# Altium PCB IObuffer.PcbDoc
Units mm, origin at the board's own origin, x right, y up, seen from the top; angles counter-clockwise.
Board outline 36 x 36 mm, 2 copper layers (Top Layer, Bottom Layer), stack 1.58 mm thick; 23 components, 17 nets, 90 pads, 30 vias.
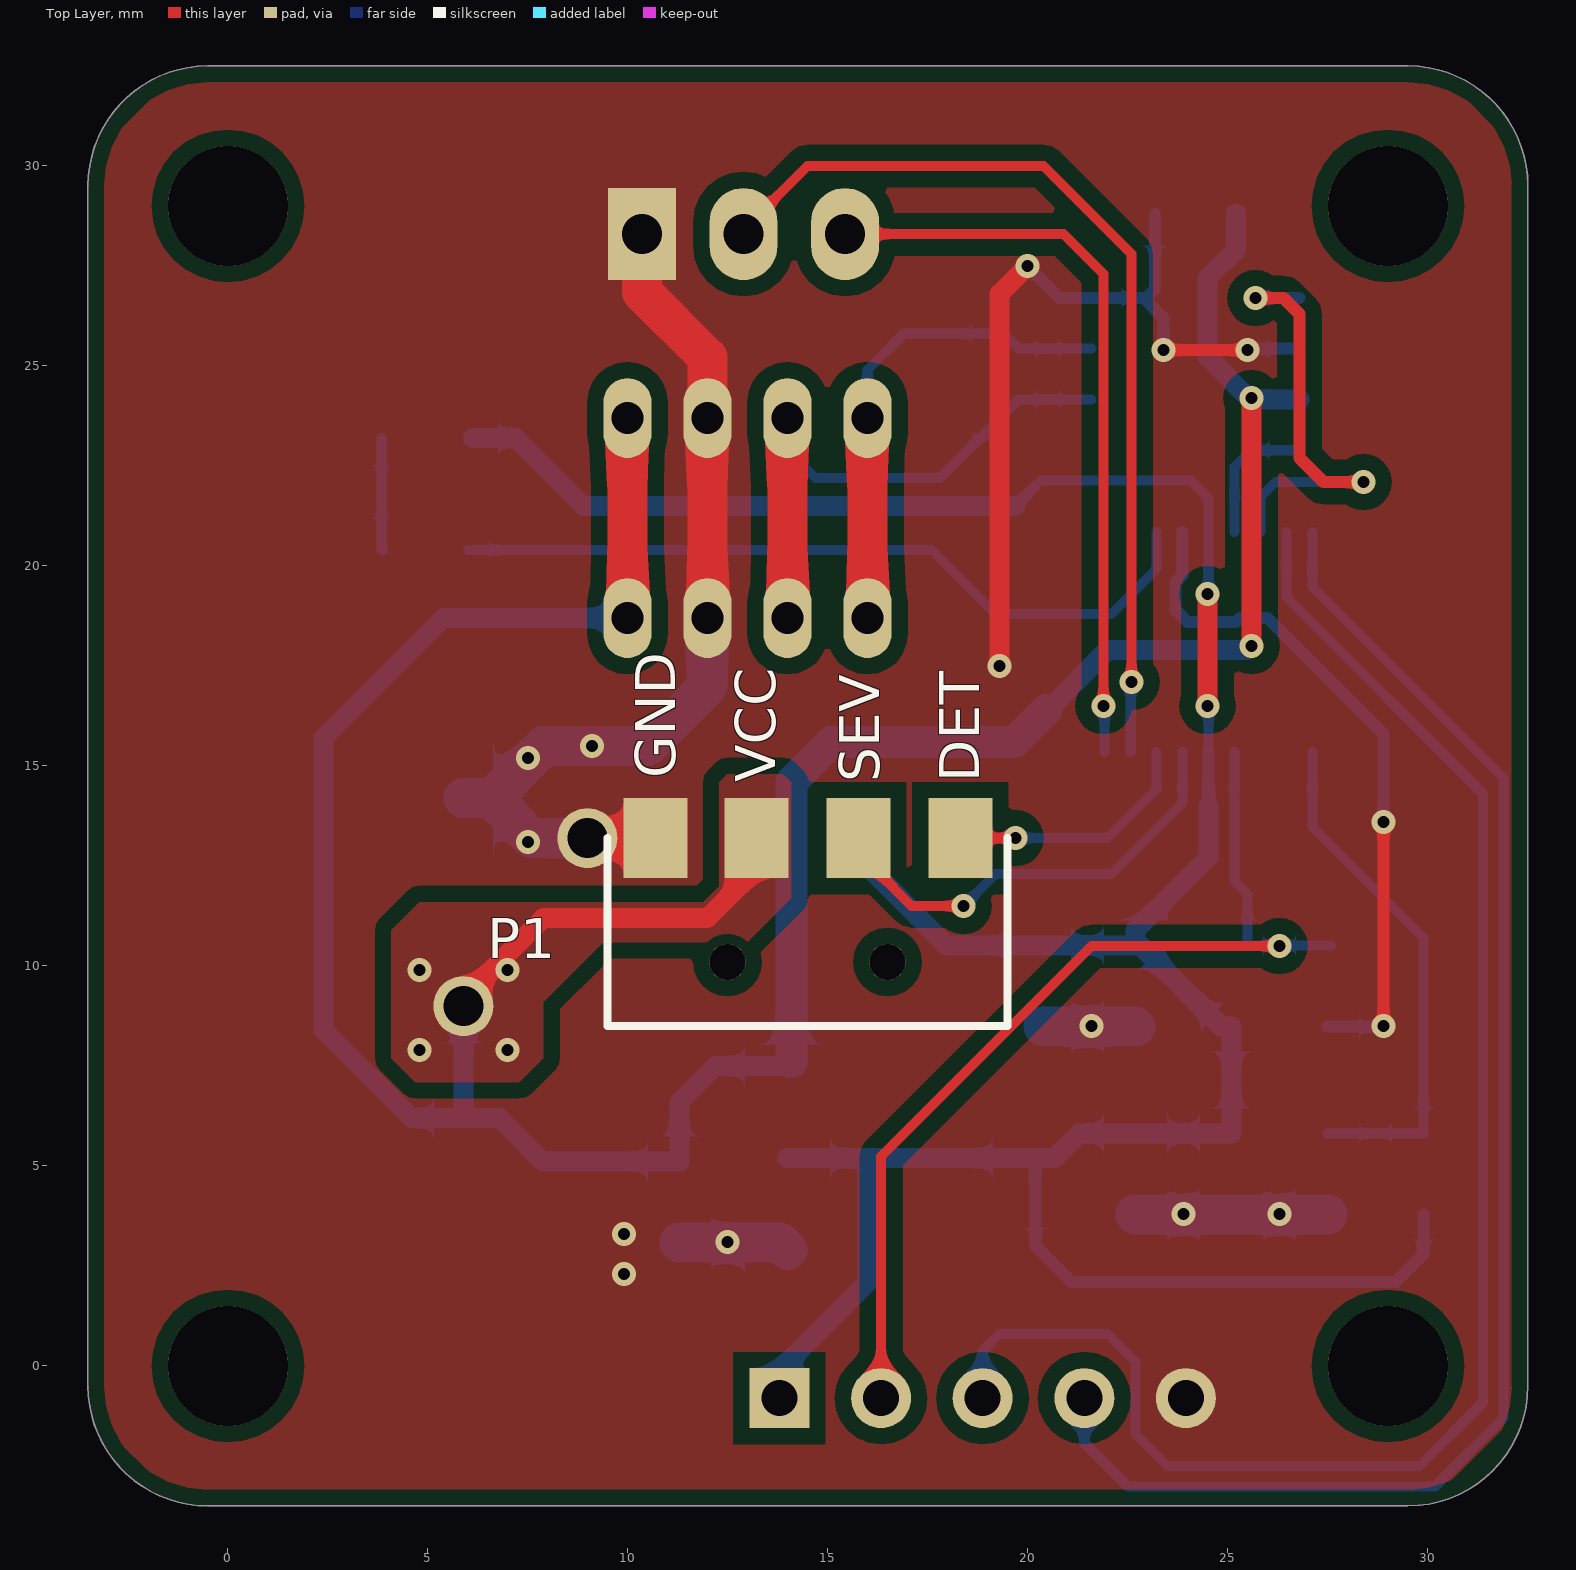
[diagram p0: Top Layer view]
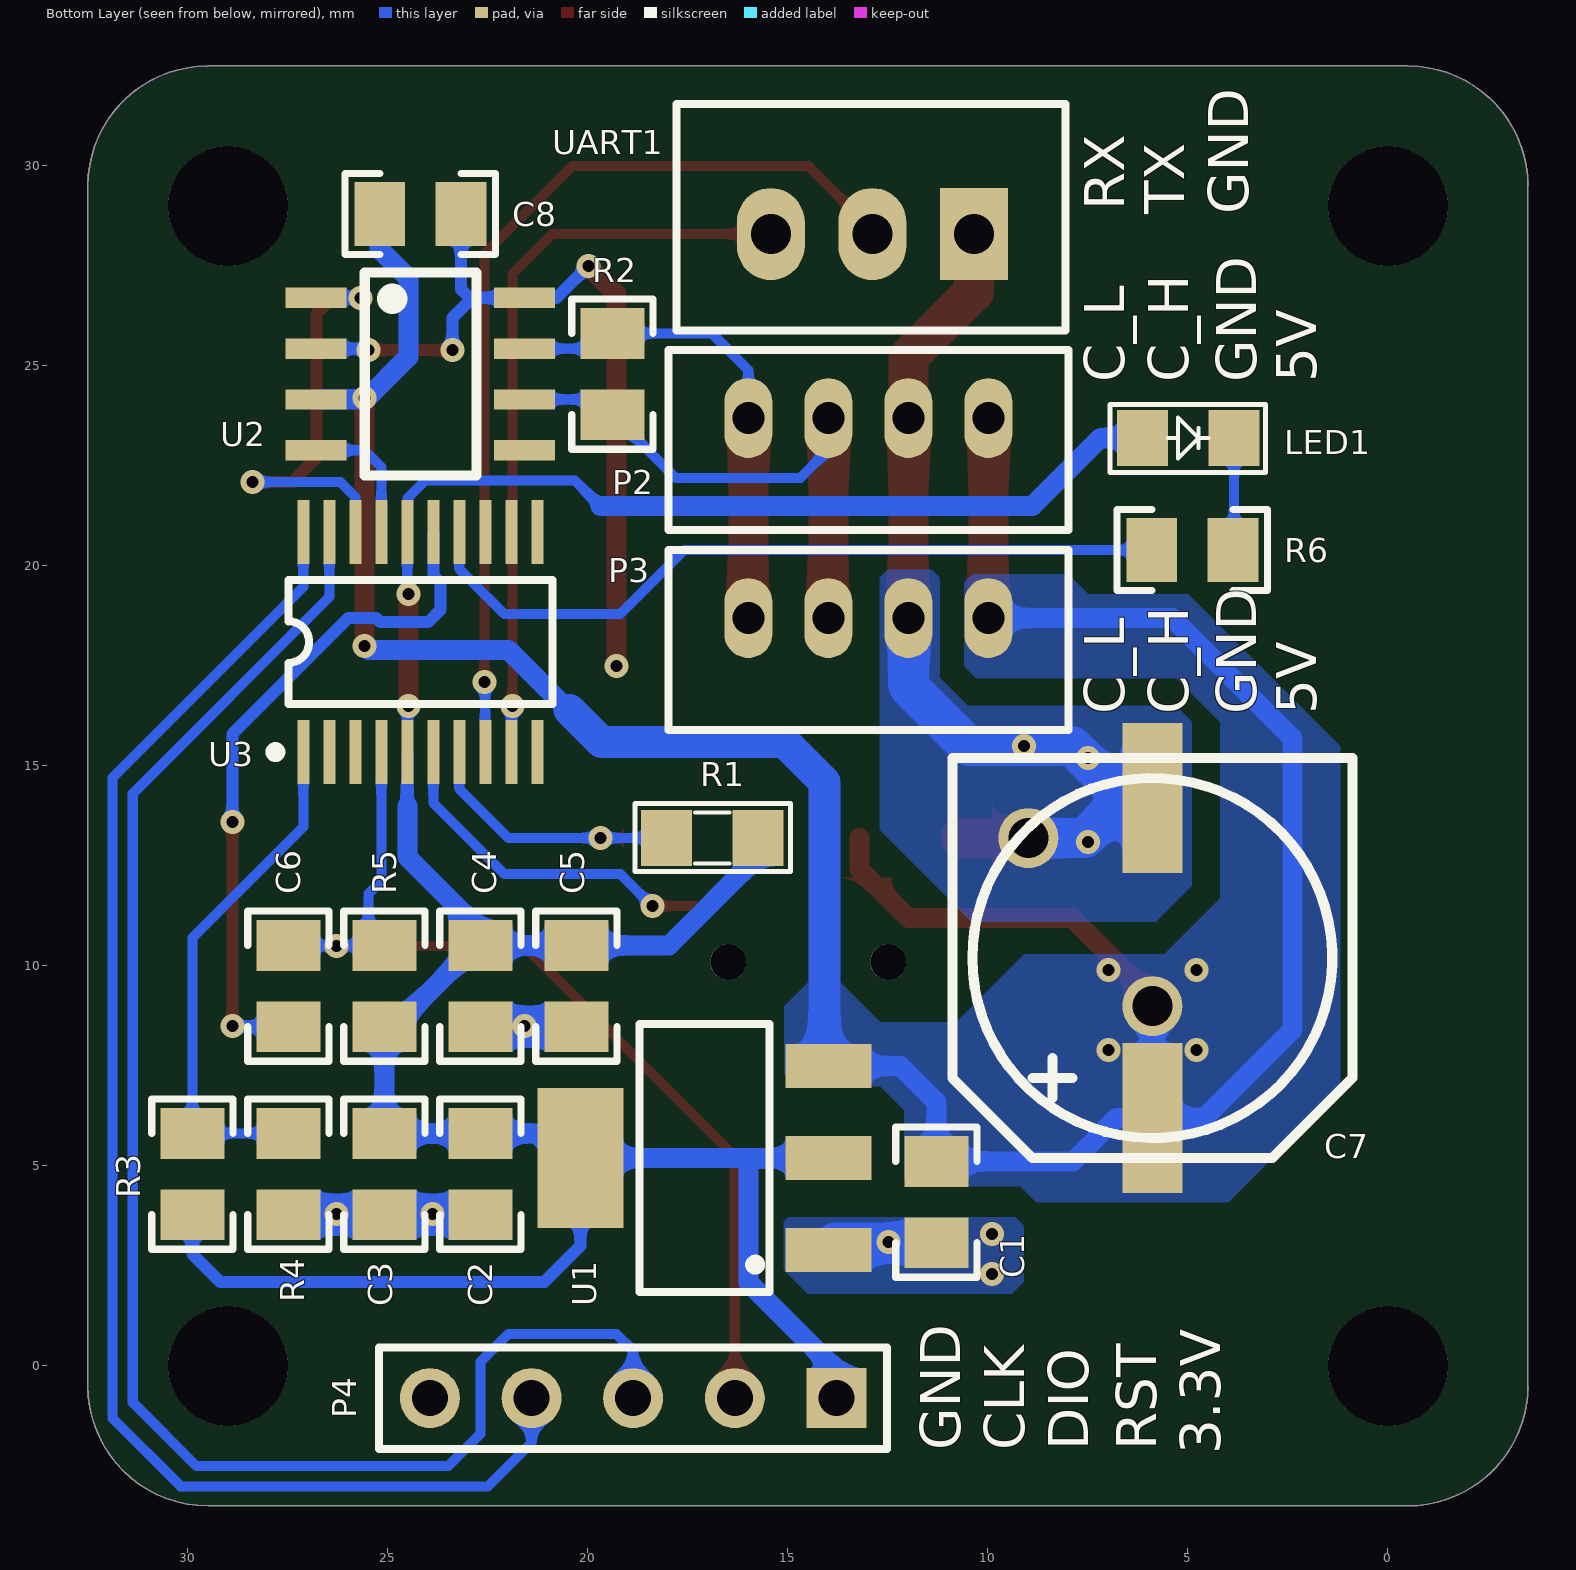
[diagram p1: Bottom Layer view, seen from below]

## Layer stack, top to bottom
Top Solder: solder mask 0.0102, Solder Resist, Dk 3.5
Top Layer: signal copper 0.0356
Dielectric 1: dielectric 1.5086, FR-4, Dk 4.8
Bottom Layer: signal copper 0.0356
Bottom Solder: solder mask 0.0102, Solder Resist, Dk 3.5

## Board outline
-0.5,-3.5 cw(c-0.5,-0.5) -3.5,-0.5 -3.5,29.5 cw(c-0.5,29.5) -0.5,32.5 29.5,32.5 cw(c29.5,29.5) 32.5,29.5 32.5,-0.5 cw(c29.5,-0.5) 29.5,-3.5

## Design rules (kind name [scope] priority, off if disabled: settings)
Clearance [All] p1: gap=0.254
HoleSize [All] p1: absolutevalues=TRUE maxlimit=5 minlimit=0.01 maxpercent=80.000 minpercent=20.000
MinimumSolderMaskSliver [All] p1: minsoldermaskwidth=0.01
PolygonConnect [All] p1: connectstyle=Direct reliefconductorwidth=0.254 reliefentries=4 polygonreliefangle="90 Angle" airgapwidth=0.254
RoutingVias [All] p1: holewidth=0.3 width=0.6 viastyle="Through Hole" minholewidth=0.3 minwidth=0.6 maxholewidth=5 maxwidth=5
SilkToSilkClearance [All] p1: silktosilkclearance=0.1
SilkToSolderMaskClearance [IsPad] p1: minsilkscreentomaskgap=0.01 clearancetoexposedcopper=TRUE
SolderMaskExpansion [All] p1: expansion=0.102
Width [All] p1: maxlimit=5 minlimit=0.254 preferedwidth=0.254
26 further rules are at their usual default settings.

## Components (designator, comment, footprint, x,y, rotation, side; value= is the part's Value field where it differs from the comment)
C1 "105" 0805_HV 11.289,4.097 r90 bottom
C2 "105" 0805_HV 22.689,4.797 r90 bottom
C3 "105" 0805_HV 25.089,4.797 r90 bottom
C4 "104" 0805_HV 22.689,9.497 r90 bottom
C5 "106" 0805_HV 20.289,9.497 r90 bottom
C6 "104" 0805_HV 27.489,9.497 r90 bottom
C7 "1000uF" TU_NHOM_470uF_25V_MH 5.889,10.197 r180 bottom locked
C8 "104" 0805_HV 24.189,28.797 r0 bottom
LED1 "LED3" LED_0805 4.989,23.197 r180 bottom
P1 "Header 4" SpringCON 14.489,10.097 r0 top locked
P2 "Header 4" JST-PH2.00-4P 12.989,23.697 r180 bottom locked
P3 "Header 4" JST-PH2.00-4P 12.989,18.697 r180 bottom locked (schematic designator P1)
P4 "Header 5" HDR1X5 13.789,-0.803 r0 bottom
R1 "10K" "Tro SMD 0805" 16.889,13.197 r0 bottom
R2 "120" 0805_HV 19.389,24.797 r90 bottom
R3 "120" 0805_HV 29.889,4.797 r90 bottom
R4 "120" 0805_HV 27.489,4.797 r90 bottom
R5 "10K" 0805_HV 25.089,9.497 r270 bottom
R6 "120" 0805_HV 4.889,20.397 r0 bottom
U1 "AMS1117-3.3V SOT223 _MH" SOT223 17.089,5.197 r90 bottom
U2 "TJA1050T/CM,118" "SOP 8" 24.189,24.797 r270 bottom
U3 "STM32F042F4P6" TSSOP20 24.189,18.097 r180 bottom
UART1 "Header 3_MH" "HEADER 3" 12.889,28.297 r0 bottom

## Footprints (in the part's own frame and the unit in brackets; to place one, negate y for a bottom-side part, rotate by r counter-clockwise, add the part's x,y. Pads: shape width x height; smd on the part's side, far side on the other; paste and mask are expansions set on the pad)
0805_HV [mil] "0805 with 30mil clearance between pads"
  rect 50x63 smd: 1(-40,0) 2(40,0)
  silkscreen extent -74,-40 74,40, body extent -43,-29 43,29, height 57
HDR1X5 [mm] "Connector; Header; 5 Position"
  rect 1.5x1.5 hole 0.9: 1(0,0)
  round 1.5 hole 0.9: 2(2.54,0) 3(5.08,0) 4(7.62,0) 5(10.16,0)
  silkscreen extent -1.27,-1.27 11.43,1.27
"HEADER 3" [mm]
  rect 1.7x2.3 hole 1 paste+0: 1(-2.54,0)
  oval 1.7x2.3 hole 1 paste+0: 2(0,0) 3(2.54,0)
  silkscreen extent -4.83,-3.25 4.9,2.41
JST-PH2.00-4P [mm]
  oval 1.2x2 hole 0.8 paste+0: 1(3,0) 2(1,0) 3(-1,0) 4(-3,0)
  silkscreen extent -5,-2.8 5,1.7, body extent -4.93,-2.97 4.93,1.7, height 5.89
LED_0805 [mil]
  rect 50x55 smd: 1(-45,0) 2(45,0)
  silkscreen extent -77,-34 76,33, body extent -41,-16 41,20, height 33
"SOP 8" [mil]
  rect 20x60 smd: 1(-75,-102.5) 2(-25,-102.5) 3(25,-102.5) 4(75,-102.5) 5(75,102.5) 6(25,102.5) 7(-25,102.5) 8(-75,102.5)
  silkscreen extent -100,-55 100,55, body extent -98,-120 100,117, height 63
SOT223 [mm] "SOT-223/SC-73; 4 Leads; Body 6.7 x 7.3 mm, inc. leads (LxW max)"
  rect 1.1x2.15 smd: 1(-2.3,-3.1) 2(0,-3.1) 3(2.3,-3.1)
  rect 3.5x2.15 smd: 4(0,3.1)
  silkscreen extent -3.35,-1.63 3.35,1.63, body extent -3.43,-1.65 3.43,1.65, height 2.54
SpringCON [mm]
  rect 1.6x2 smd paste+0: 1(-3.8,3.1) 2(-1.275,3.1) 3(1.275,3.1) 4(3.825,3.1)
  round 0.9 hole 0.9 paste+0: NC(-2,0) NC(2,0)
  silkscreen extent -5,-1.6 5,3.1, body extent -5,-1.63 5,3.37, height 4.31
"Tro SMD 0805" [mil]
  rect 50x55 smd: 1(-45,0) 2(45,0)
  silkscreen extent -77,-34 76,33, body extent -62,-28 56,27, height 21
TSSOP20 [mm] "Shrink Small Outline; 20 Leads; Body Width 4.4 mm; Pitch 0.65 mm"
  rect 0.3x1.6 smd: 1(-2.925,-2.75) 2(-2.275,-2.75) 3(-1.625,-2.75) 4(-0.975,-2.75) 5(-0.325,-2.75) 6(0.325,-2.75) 7(0.975,-2.75) 8(1.625,-2.75) 9(2.275,-2.75) 10(2.925,-2.75) 11(2.925,2.75) 12(2.275,2.75) 13(1.625,2.75) 14(0.975,2.75) 15(0.325,2.75) 16(-0.325,2.75) 17(-0.975,2.75) 18(-1.625,2.75) 19(-2.275,2.75) 20(-2.925,2.75)
  silkscreen extent -3.75,-2.87 3.3,1.55, body extent -3.3,-3.3 3.3,3.3, height 1.12
TU_NHOM_470uF_25V_MH [mm]
  rect 1.5x3.75 smd: 1(0,-4) 2(0,4)
  silkscreen extent -5,-5 5,5, body extent -5.15,-5.5 5.15,5.5, height 7.9

## Part data
C1 C2 C3: library part CM, "Cap SMD"
C4 C5 C6 C8: library part "Capacitor 0805", "Ceramic Chip Capacitor - Standard"
C7: library part TU_NHOM_1000uF_16V_MH, "TU_NHOM_1000uF_16V_MH"
LED1: library part "LED SMD_0805_MH", "LED 3mm"
P1 P2 P3: "Header, 4-Pin"
P4: "Header, 5-Pin"
R1 R2 R3 R4 R5 R6: library part "R nho", "RES, 100, 1%, 0.1 W, 0402"
UART1: "Header 3P XH2.54 th?ng"

## Free pads (board coordinates)
  round 1.5 hole 1: 1(5.889,8.997) 1(8.989,13.197)
  round 3 hole 3 paste+0: NC(0,0) NC(0,29) NC(29,0) NC(29,29)

## Via types
v1: diameter 0.6, hole 0.3, Top Layer to Bottom Layer, tented both sides, 30 vias

## Nets (pads, with @x,y where several pads share a name; then routed paths per layer and width w, separated by ;. In a path a pad name is that pad's centre, name@x,y a point inside that pad or via, vN(x,y) a via of type N, cw(c..) or ccw(c..) an arc to the next point about the centre after c; other vN are vias at no path point)
3.3V: C2.2 C3.2 C4.2 C5.2 LED1.1 P4.1 R1.1 R3.1 R5.2 U1.2 U1.4 U3.5 U3.16 | length 77.6
  Top Layer w0.5: v1(24.489,16.497) v1(24.489,19.297)
  Bottom Layer w0.254: 19.689,21.497 20.326,22.134 24.066,22.134 24.514,21.686 U3.16 24.514,19.322 v1(24.489,19.297) ; v1(24.489,16.497) 24.514,16.472 U3.5
  Bottom Layer w0.3: U1.4 20.189,2.997 21.089,2.097 29.189,2.097 29.889,2.797 R3.1 ; 24.514,13.997 U3.5
  Bottom Layer w0.5: LED1.1 7.189,23.197 8.889,21.497 19.689,21.497 ; P4.1 13.789,-0.111 15.989,2.089 15.989,5.097 15.889,5.197 ; U1.2 U1.4 20.673,5.197 21.289,5.813 C2.2 C3.2 25.089,8.381 R5.2@24.989,8.481 ; R1.1 15.746,12.74 17.973,10.513 C5.2 C4.2 ; 24.514,13.997 24.514,12.722 22.689,10.897 C4.2 ; R5.2 R5.2@24.989,8.481 ; C4.2 22.805,10.513 24.837,8.481 R5.2@24.989,8.481
5V: C1.2 C7.1 C8.2 P1.2 P2.1 P3.1 pad.1@5.889,8.997 U1.3 U2.3 | length 81.3
  Top Layer w0.5: pad.1@5.889,8.997 5.889,9.197 7.889,11.197 11.989,11.197 13.214,12.422 P1.2 ; v1(25.589,17.997) v1(25.589,24.197)
  Top Layer w1: P3.1 P2.1
  Bottom Layer w0.5: pad.1@5.889,8.997 C7.1 ; P3.1 5.389,18.697 2.389,15.697 2.389,8.397 4.589,6.197 C7.1 ; U1.3@14.089,7.597 U1.3 12.189,7.497 11.289,6.597 C1.2 7.873,5.113 6.789,6.197 C7.1 ; 20.475,16.382 21.993,17.901 22.922,17.901 22.926,17.897 25.489,17.897 v1(25.589,17.997) ; C8.2 25.205,27.913 24.489,27.197 24.489,25.227 25.554,24.162 U2.3
  Bottom Layer w0.8: U1.3@14.089,7.597 14.089,14.597 15.089,15.597 19.66,15.597 20.46,16.397
  other v1: 4.789,7.897 6.989,7.897 4.789,9.897 6.989,9.897
CAN_H: P2.4 P3.4 R2.2 U2.7 | length 12.3
  Top Layer w1: P3.4 P2.4
  Bottom Layer w0.254: P2.4 15.989,24.897 16.905,25.813 R2.2 19.77,25.432 U2.7
CAN_L: P2.3 P3.3 R2.1 U2.6 | length 14.5
  Top Layer w1: P3.3 P2.3
  Bottom Layer w0.254: P2.3 13.989,22.897 14.689,22.197 17.805,22.197 R2.1 19.77,24.162 U2.6
CAN_RX: U2.4 U3.17 | length 3.4
  Bottom Layer w0.254: U3.17 25.164,22.472 25.584,22.892 U2.4
CAN_TX: U2.1 U3.18 | length 11.4
  Top Layer w0.3: v1(25.689,26.697) 26.389,26.697 26.789,26.297 26.789,22.697 27.389,22.097 v1(28.389,22.097)
  Bottom Layer w0.254: U3.18 25.814,21.722 26.189,22.097 v1(28.389,22.097)
  Bottom Layer w0.3: v1(25.689,26.697) 25.694,26.702 U2.1
DET: P1.4 R1.2 U3.7 | length 7.7
  Top Layer w0.254: P1.4 v1@19.389,13.197
  Bottom Layer w0.254: R1.2 21.989,13.197 23.214,14.422 U3.7
  other v1: 19.689,13.197
GND: C1.1 C2.1 C3.1 C4.1 C5.1 C6.1 C7.2 C8.1 P1.1 P2.2 P3.2 P4.5 pad.1@8.989,13.197 R4.1 U1.1 U2.2 U2.8 U3.15 UART1.1 | length 71.8
  Top Layer w0.3: v1(23.389,25.397) v1(25.489,25.397) ; v1(28.889,8.497) v1(28.889,13.597)
  Top Layer w0.5: v1(19.289,17.497) 19.289,26.797 v1(19.989,27.497)
  Top Layer w1: pad.1@8.989,13.197 P1.1 ; UART1.1 10.349,26.851 11.989,25.211 P2.2 P3.2
  Bottom Layer w0.3: v1(19.989,27.497) 20.784,26.702 U2.8 22.884,26.702 ; C8.1 23.173,26.913 22.962,26.702 22.884,26.702 ; v1(23.389,25.397) 23.389,26.197 22.884,26.702 ; U3.15 23.864,19.764 23.689,19.589 23.689,18.897 23.993,18.593 25.189,18.593 25.297,18.701 25.985,18.701 28.889,15.797 v1(28.889,13.597) ; v1(25.489,25.397) 25.524,25.432 U2.2 ; C6.1 28.973,8.481 28.957,8.497 v1(28.889,8.497)
  Bottom Layer w1: C7.2 C7.2@6.589,14.197 ; pad.1@8.989,13.197 7.589,13.197 C7.2@6.589,14.197 ; C1.1 13.805,3.081 U1.1 ; P3.2 11.989,16.997 10.489,15.497 7.897,15.497 6.597,14.197 C7.2@6.589,14.197 ; C5.1@20.389,8.481 C4.1 ; C2.1 C3.1 R4.1
  other v1: 9.9,2.3 12.489,3.097 9.9,3.3 23.889,3.797 26.289,3.797 21.589,8.497 7.5,13.1 7.5,15.2 9.1,15.497
NetLED1_2: LED1.2 R6.1 | length 2.8
  Bottom Layer w0.254: LED1.2 3.846,20.424 R6.1
NetR3_2: R3.2 R4.2 U3.1 | length 13.1
  Bottom Layer w0.254: U3.1 27.114,13.472 29.889,10.697 R3.2 R4.2
RB1: R6.2 U3.14 | length 19.3
  Bottom Layer w0.254: R6.2@6.005,20.397 17.589,20.397 19.189,18.797 22.089,18.797 23.214,19.922 U3.14
RST: C6.2 P4.2 R5.1 U3.4 | length 25.2
  Top Layer w0.254: P4.2 16.329,5.237 21.589,10.497 v1(26.289,10.497)
  Bottom Layer w0.254: U3.4 25.164,12.122 25.489,11.797 25.489,10.513 C6.2 C6.2@27.573,10.513
RX: U3.9 UART1.3 | length 18.8
  Top Layer w0.254: UART1.3 20.889,28.297 21.889,27.297 v1(21.889,16.497)
  Bottom Layer w0.254: U3.9 v1@21.914,16.472
SERVO_C: P1.3 U3.6 | length 11.4
  Top Layer w0.254: P1.3 15.764,12.822 17.089,11.497 v1(18.389,11.497)
  Bottom Layer w0.254: v1(18.389,11.497) 19.189,12.297 22.089,12.297 23.864,14.072 U3.6
SWCLK: P4.4 U3.20 | length 36.9
  Bottom Layer w0.254: P4.4 21.409,-1.923 22.497,-3.011 30.181,-3.011 31.889,-1.303 31.889,14.697 27.114,19.472 U3.20
SWDIO: P4.3 U3.19 | length 40.7
  Bottom Layer w0.254: P4.3 18.869,0.377 19.289,0.797 21.989,0.797 22.689,0.097 22.689,-1.703 23.489,-2.503 29.789,-2.503 31.381,-0.911 31.381,14.305 26.464,19.222 U3.19
TX: U3.8 UART1.2 | length 23.8
  Top Layer w0.254: UART1.2 12.889,28.397 14.489,29.997 20.389,29.997 22.589,27.797 v1(22.589,17.097)
  Bottom Layer w0.254: U3.8 22.57,15.353 22.57,17.078 v1(22.589,17.097)
pads on no net: P1.NC U2.5 U3.2 U3.3 U3.10 U3.11 U3.12 U3.13

## Polygon pours and split planes (outlines as drawn)
GND on Top Layer "Bottom Layer-No Net" (solid, pour order 6): 15,32.5 -1.1,32.5 -2.4,31.2 -3.5,30.1 -3.5,28 -3.5,-1.117 -1.2,-3.417 30.026,-3.417 32.472,-0.97 32.472,30.145 30.2,32.417 30.183,32.4 29.3,32.4
5V on Top Layer "Bottom Layer-No Net" (solid, pour order 2): 12.289,14.597 12.289,11.997 11.989,11.697 11.889,11.597 10.089,11.597 4.789,11.597 4.189,10.997 4.089,10.897 4.089,8.897 4.089,7.697 4.489,7.297 4.689,7.097 6.489,7.097 7.289,7.097 7.589,7.397 7.889,7.697 7.889,8.597 7.889,9.097 8.989,10.197 9.389,10.597 11.489,10.597 12.989,10.597 13.889,11.497 14.089,11.697 14.089,14.297 14.089,14.597 13.889,14.797 12.489,14.797
GND on Bottom Layer "Bottom Layer-No Net" (solid, pour order 10): 15.1,3.6 14.987,3.713 12.086,3.713 9.313,3.713 9.1,3.5 9.1,2.5 9.1,2.1 9.4,1.8 12.5,1.8 14.5,1.8 15.1,2.4 15.1,3.6
GND on Bottom Layer "Bottom Layer-No Net" (solid, pour order 8): 11.2,19.7 11.2,17.7 11.2,17.2 10.9,16.9 10.5,16.5 8.7,16.5 5.3,16.5 5,16.2 4.9,16.1 4.9,12.8 4.9,12 5.3,11.6 5.8,11.1 7.6,11.1 10.4,11.1 11,11.7 12.7,13.4 12.7,18.3 12.7,19.7 12.5,19.9 11.4,19.9
5V on Bottom Layer "Bottom Layer-No Net" (solid, pour order 4): 10.589,19.597 10.389,19.797 8.989,19.797 7.989,19.797 7.589,19.397 7.489,19.297 6.589,19.297 4.989,19.297 1.689,15.997 1.189,15.497 1.189,12.997 1.189,6.897 3.489,4.597 3.989,4.097 6.989,4.097 8.789,4.097 9.189,4.497 10.489,4.497 11.889,4.497 12.089,4.697 12.089,6.297 12.089,6.397 12.689,6.997 14.289,6.997 14.789,6.997 15.089,7.297 15.089,8.497 15.089,8.997 14.489,9.597 13.689,9.597 13.489,9.397 12.689,8.597 11.589,8.597 10.789,8.597 9.789,9.597 9.089,10.297 6.189,10.297 5.589,10.297 4.589,11.297 4.189,11.697 4.189,14.197 4.189,16.097 4.789,16.697 5.289,17.197 7.289,17.197 10.289,17.197 10.589,17.497

## Keep-outs
Keep-Out Layer:
  the board outline again, w0.013

## Silkscreen, mask and mechanical layers (free items; w line width, h text height)
Top Overlay:
  text "GND" at 11.189,14.697 h1 r90
  text "VCC" at 13.689,14.597 h1 r90
  text "SEV" at 16.289,14.597 h1 r90
  text "DET" at 18.789,14.597 h1 r90
Bottom Overlay:
  text "RX" at 6.589,28.897 h1 r270
  text "GND" at 3.489,28.797 h1 r270
  text "TX" at 5.089,28.797 h1 r270
  text "5V" at 1.789,24.597 h1 r270
  text "GND" at 3.289,24.597 h1 r270
  text "C_H" at 4.989,24.597 h1 r270
  text "C_L" at 6.589,24.597 h1 r270
  text "5V" at 1.789,16.297 h1 r270
  text "GND" at 3.289,16.297 h1 r270
  text "C_H" at 4.989,16.297 h1 r270
  text "C_L" at 6.589,16.297 h1 r270
  text "RST" at 5.789,-2.103 h1 r270
  text "DIO" at 7.489,-2.103 h1 r270
  text "CLK" at 9.089,-2.103 h1 r270
  text "GND" at 10.689,-2.103 h1 r270
  text "3.3V" at 4.189,-2.203 h1 r270
Mechanical 3:
  circle w0.013: c16.491,10.104 r0.45
  circle w0.013: c12.491,10.104 r0.45
  circle w0.013: c-0.009,29.004 r1.5
  circle w0.013: c-0.009,0.004 r1.5
  circle w0.013: c28.991,0.004 r1.5
  circle w0.013: c28.991,29.004 r1.5
  circle w0.013: c0,0 r1.5
  circle w0.013: c12.5,10.1 r0.45
  circle w0.013: c16.5,10.1 r0.45
  circle w0.013: c29,29 r1.5
  circle w0.013: c29,0 r1.5
  circle w0.013: c0,29 r1.5
  lines w0.013: -3.509,-0.496 ccw(c-0.509,-0.496) -0.509,-3.496 29.491,-3.496 ccw(c29.491,-0.496) 32.491,-0.496 32.491,29.504 ccw(c29.491,29.504) 29.491,32.504 -0.509,32.504 ccw(c-0.509,29.504) -3.509,29.504 -3.509,-0.496 ; -3.509,7.004 -3.509,22.004 0.491,22.004 0.491,7.004 -3.509,7.004 ; 3.491,-2.496 25.491,-2.496 25.491,2.304 3.491,2.304 3.491,-2.496 ; 3.491,26.704 25.491,26.704 25.491,31.504 3.491,31.504 3.491,26.704 ; 9.5,8.5 9.5,13.2 19.5,13.2 19.5,8.5 9.5,8.5 ; 9.94,12.3 9.94,14.1 11.44,14.1 11.44,12.3 9.94,12.3 ; 12.48,12.3 12.48,14.1 13.98,14.1 13.98,12.3 12.48,12.3 ; 15.02,12.3 15.02,14.1 16.52,14.1 16.52,12.3 15.02,12.3 ; 17.56,12.3 17.56,14.1 19.06,14.1 19.06,12.3 17.56,12.3 ; 28.491,7.004 28.491,22.004 32.491,22.004 32.491,7.004 28.491,7.004